# Altium PCB miniGateway（已经打样）.PcbDoc
Units mm, origin at the board's own origin, x right, y up, seen from the top; angles counter-clockwise.
Board outline 152.4 x 101.6 mm, 2 copper layers (Top Layer, Bottom Layer); 16 components, 29 nets, 119 pads, 8 vias.
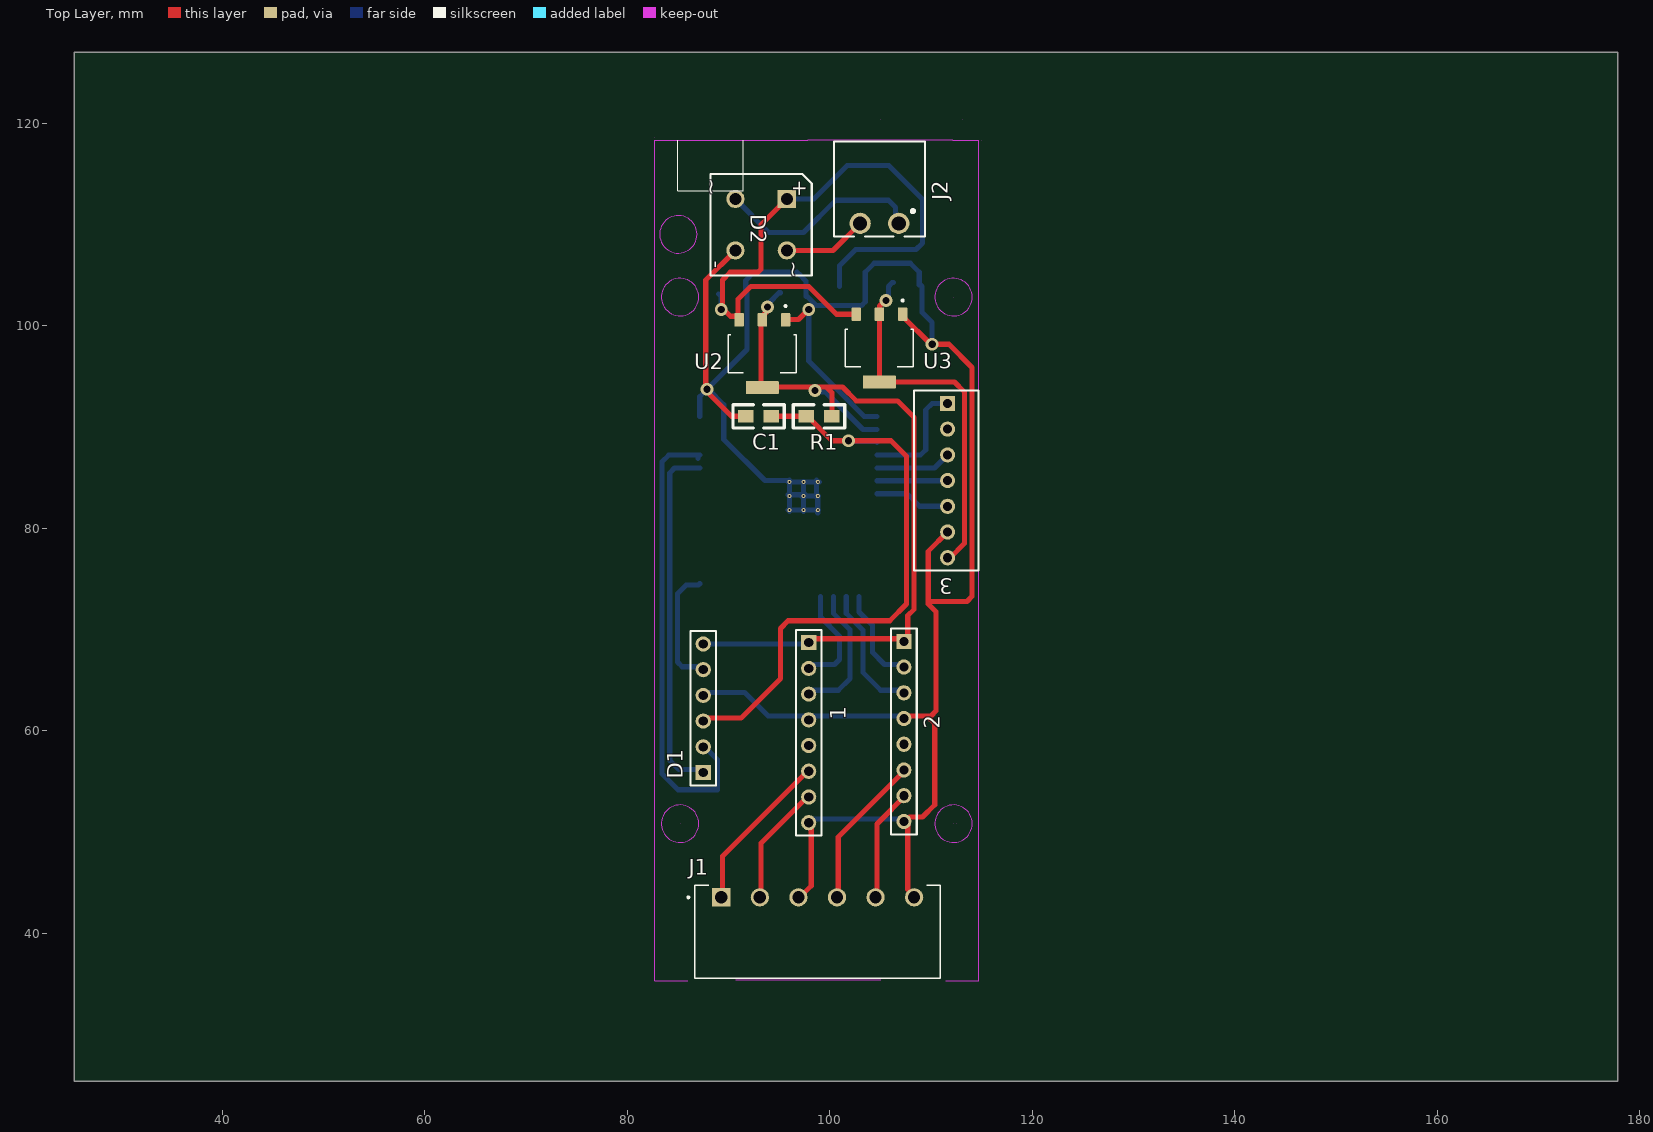
[diagram p0: Top Layer view]
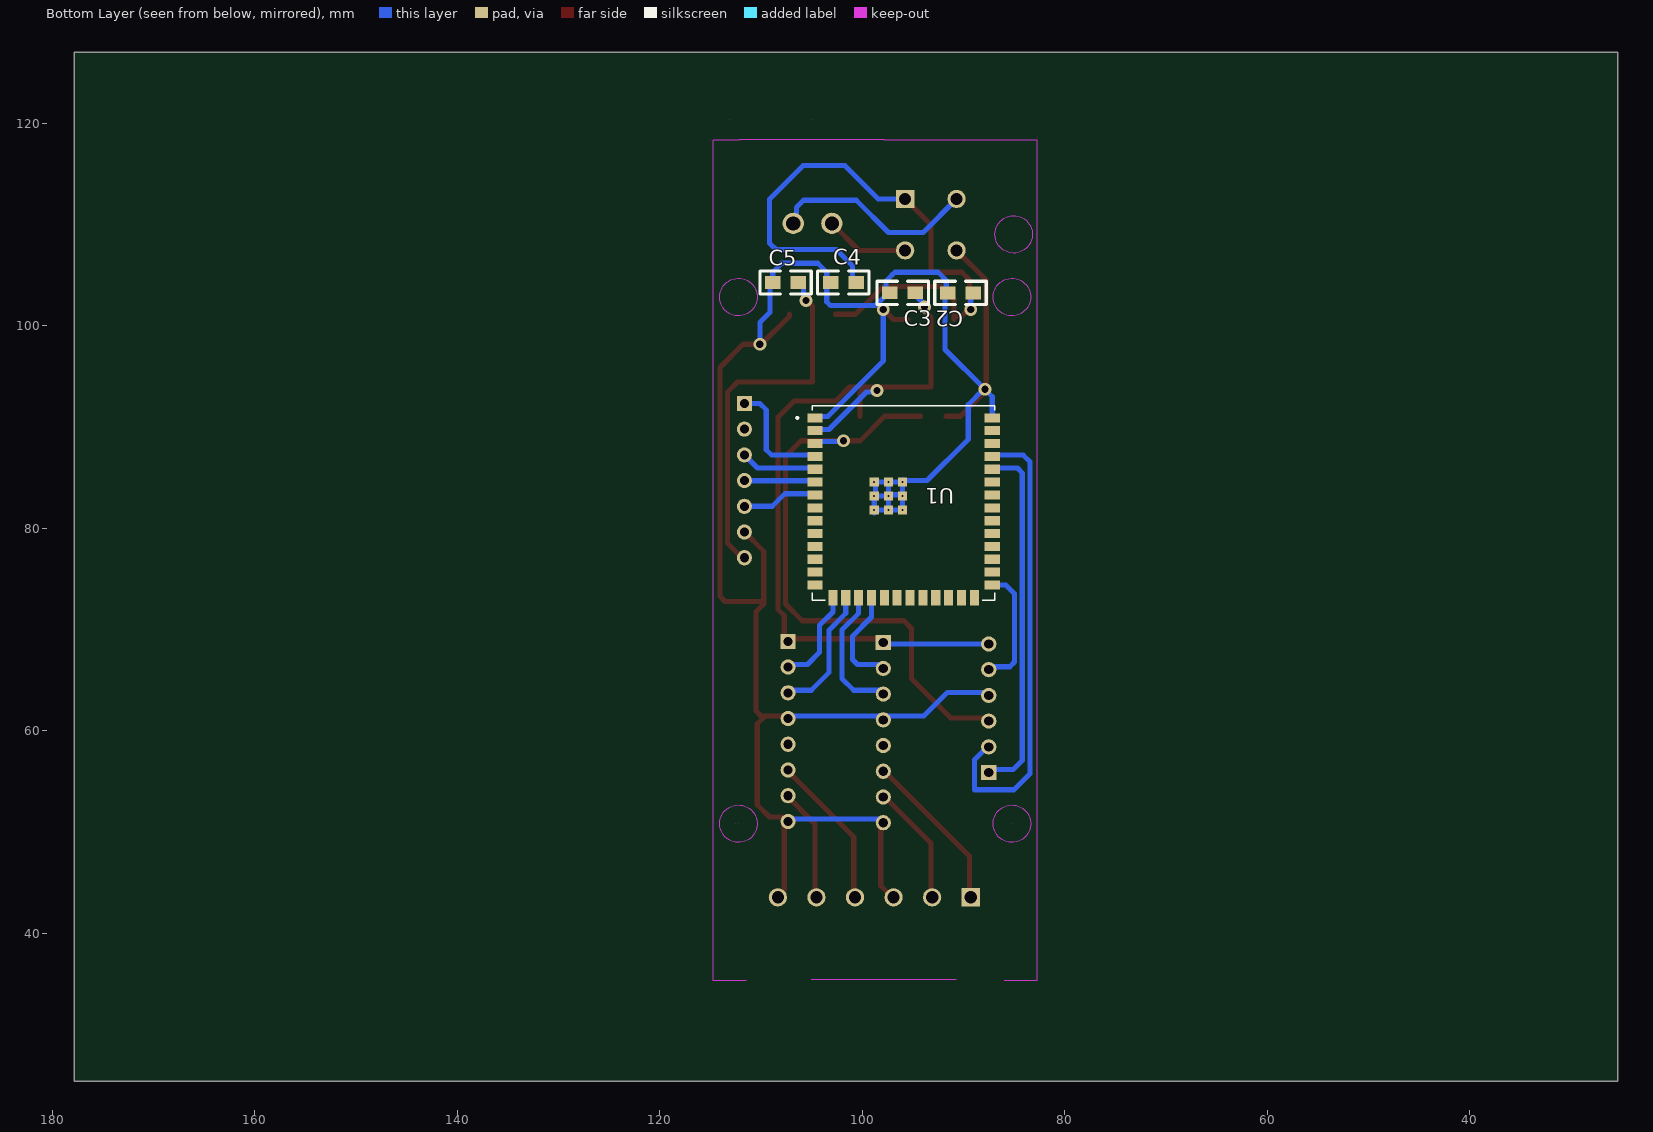
[diagram p1: Bottom Layer view, seen from below]

## Layer stack, top to bottom
Top Solder: solder mask 0.0102, Solder Resist, Dk 3.5
Top Layer: signal copper 0.0356
Dielectric 1: dielectric 0.32, FR-4, Dk 4.8
Bottom Layer: signal copper 0.0356
Bottom Solder: solder mask 0.0102, Solder Resist, Dk 3.5

## Board outline
25.4,25.4 177.8,25.4 177.8,127 25.4,127

## Design rules (kind name [scope] priority, off if disabled: settings)
Clearance [All] p1: gap=0.254 ignorepadtopadclearanceinfootprint=FALSE except(0: Arc-Hole Track-Hole SMDPad-Hole THPad-Hole Via-Hole Fill-Hole Poly-Hole Region-Hole Text-Hole)
PolygonConnect [All] p1: connectstyle=Relief reliefconductorwidth=0.254 reliefentries=4 polygonreliefangle="90 Angle" airgapwidth=0.254
RoutingVias [All] p1: holewidth=0.711 width=1.27 viastyle="Through Hole" minholewidth=0.711 minwidth=1.27 maxholewidth=0.711 maxwidth=1.27
SolderMaskExpansion [All] p1: expansion=0.102 istentingtop=FALSE
Width [All] p1: maxlimit=0.508 minlimit=0.508 preferedwidth=0.508
30 further rules are at their usual default settings.

## Components (designator, comment, footprint, x,y, rotation, side; value= is the part's Value field where it differs from the comment)
1 "Header 8" HDR1X8 97.917,68.707 r270 top
2 "Header 8" HDR1X8 107.315,68.834 r270 top
3 "DS1307模块" DS1307 111.633,92.329 r270 top
C1 "100pf" 0805 91.694,91.059 r180 top value=100pF
C2 "100pf" 0805 91.565,103.249 r0 bottom value=100pF
C3 "100pf" 0805 97.282,103.251 r0 bottom value=100pF
C4 "100pf" 0805 103.124,104.267 r0 bottom value=100pF
C5 "100pf" 0805 108.839,104.267 r0 bottom value=100pF
D1 "2.54DIP6" HDR1X6 87.503,55.88 r90 top
D2 "整流全桥-插" D-38 93.218,109.982 r270 top
J1 "1803316" 6PIN3.81mm 98.298,42.164 r0 top
J2 "691322310002" 691322310002 104.902,110.109 r180 top
R1 "10K" 0805 100.203,91.059 r0 top
U1 "ESP32-S3-WROOM-1U" ESP32-S3-WROOM 97.436,83.133 r180 bottom
U2 "AMS1117-3.3" SOT229P700X180-4N 93.341,97.239 r270 top
U3 "AMS1117-5" SOT229P700X180-4N 104.902,97.79 r270 top

## Footprints (in the part's own frame and the unit in brackets; to place one, negate y for a bottom-side part, rotate by r counter-clockwise, add the part's x,y. Pads: shape width x height; smd on the part's side, far side on the other; paste and mask are expansions set on the pad)
6PIN3.81mm [mm]
  rect 1.8x1.8 hole 1.2: 1(-9.017,1.397)
  round 1.8 hole 1.2: 2(-5.207,1.397) 3(-1.397,1.397) 4(2.413,1.397) 5(6.223,1.397) 6(10.033,1.397)
  silkscreen extent -12.37,-6.6 12.63,2.6
0805 [mil]
  rect 60x50 smd: 1(0,0) 2(-100,0)
  silkscreen extent -150,-45 50,45
691322310002 [mm]
  round 2.1 hole 1.4: 1(-1.905,0) 2(1.905,0)
  silkscreen extent -4.5,-8.1 4.5,1.3
D-38 [mm] "Bridge Rectifier; 4 Terminals; Body 9.4 x 9.4 mm (typ); Pitch 5.08 mm"
  rect 1.8x1.8 hole 1.2: 1(-2.54,2.54)
  round 1.8 hole 1.2: 2(-2.54,-2.54) 3(2.54,-2.54) 4(2.54,2.54)
  silkscreen extent -5,-5 5,5, body extent -5,-5 5,5, height 9.91
DS1307 [mm] "Connector; Header; 7 Position"
  rect 1.5x1.5 hole 0.9: 1(0,0)
  round 1.5 hole 0.9: 2(2.54,0) 3(5.08,0) 4(7.62,0) 5(10.16,0) 6(12.7,0) 7(15.24,0)
  silkscreen extent -1.27,-3.3 16.51,3.05
ESP32-S3-WROOM [mm]
  rect 1.5x0.9 smd: 1(-7.226,7.775) 2(-7.226,6.505) 3(-7.226,5.235) 4(-7.226,3.965) 5(-7.226,2.695) 6(-7.226,1.425) 7(-7.226,0.155) 8(-7.226,-1.115) 9(-7.226,-2.385) 10(-7.226,-3.655) 11(-7.226,-4.925) 12(-7.226,-6.195) 13(-7.226,-7.465) 14(-7.226,-8.735) 27(10.274,-8.735) 28(10.274,-7.465) 29(10.274,-6.195) 30(10.274,-4.925) 31(10.274,-3.655) 32(10.274,-2.385) 33(10.274,-1.115) 34(10.274,0.155) 35(10.274,1.425) 36(10.274,2.695) 37(10.274,3.965) 38(10.274,5.235) 39(10.274,6.505) 40(10.274,7.775)
  rect 0.9x1.5 smd: 15(-5.461,-9.985) 16(-4.191,-9.985) 17(-2.921,-9.985) 18(-1.651,-9.985) 19(-0.381,-9.985) 20(0.889,-9.985) 21(2.159,-9.985) 22(3.429,-9.985) 23(4.699,-9.985) 24(5.969,-9.985) 25(7.239,-9.985) 26(8.509,-9.985)
  rect 0.9x0.9 smd: 41_1(-1.376,1.455) 41_2(0.024,1.455) 41_3(1.424,1.455) 41_4(-1.376,0.055) 41_5(0.024,0.055) 41_6(1.424,0.055) 41_7(-1.376,-1.345) 41_8(0.024,-1.345) 41_9(1.424,-1.345)
  round 0.4 hole 0.2 mask+0: 41_10(-1.376,1.455) 41_11(0.024,1.455) 41_12(-1.376,0.055) 41_13(0.024,0.055) 41_14(1.424,1.455) 41_16(1.424,0.055) 41_17(-1.376,-1.345) 41_18(0.024,-1.345) 41_19(1.424,-1.345)
  silkscreen extent -9.08,-10.24 10.52,8.96
HDR1X6 [mm] "Connector; Header; 6 Position"
  rect 1.5x1.5 hole 0.9: 1(0,0)
  round 1.5 hole 0.9: 2(2.54,0) 3(5.08,0) 4(7.62,0) 5(10.16,0) 6(12.7,0)
  silkscreen extent -1.27,-1.27 13.97,1.27
HDR1X8 [mm] "Connector; Header; 8 Position"
  rect 1.5x1.5 hole 0.9: 1(0,0)
  round 1.5 hole 0.9: 2(2.54,0) 3(5.08,0) 4(7.62,0) 5(10.16,0) 6(12.7,0) 7(15.24,0) 8(17.78,0)
  silkscreen extent -1.27,-1.27 19.05,1.27
SOT229P700X180-4N [mm]
  rrect15% 1.31x0.93 smd: 1(-3.345,2.29) 2(-3.345,0) 3(-3.345,-2.29)
  rrect15% 1.31x3.24 smd: 4(3.345,0)
  silkscreen extent -4.8,-3.36 1.86,3.36, body extent -3.5,-3.25 3.5,3.25, height 1.8

## Part data
1 2: "Header, 8-Pin", LatestRevisionDate=17-Jul-2002, LatestRevisionNote="Re-released for DXP Platform.", Publisher="Altium Limited"
3: library part "Header 7", "Header, 7-Pin", LatestRevisionDate=17-Jul-2002, LatestRevisionNote="Re-released for DXP Platform.", Publisher="Altium Limited"
C1 C2 C3 C4 C5: library part "Cap Semi", "Capacitor (Semiconductor SIM Model)", LatestRevisionDate=29-May-2009, LatestRevisionNote="IPC-7351 Footprint Added.", PackageDescription="Chip Capacitor", PackageReference=C1206, Published=8-Jun-2000, Publisher="Altium Limited"
D1: library part "Header 6", "Header, 6-Pin", LatestRevisionDate=17-Jul-2002, LatestRevisionNote="Re-released for DXP Platform.", Publisher="Altium Limited"
D2: library part Bridge1, "Full Wave Diode Bridge", DatasheetVersion=E2732B, LatestRevisionDate=29-May-2009, LatestRevisionNote="Sch pins A & K swapped.", PackageDescription="Bridge Rectifier; 4 Terminals; Body 9.4 x 9.4 mm (typ); Pitch 5.08 mm", PackageReference=D-38, Published=8-Jun-2000, Publisher="Altium Limited"
J1: "6 Position Terminal Block Header, Male Pins, Shrouded _4 Side_ 0.150 _3.81mm_ 90Â°, Right Angle Through Hole", Package=None, Availability=Unavailable, MF="Phoenix Contact", MP=1803316, Price=None, SnapEDA_Link=https://www.snapeda.com/parts/1803316/Phoenix%20Contact/view-part/681506/?ref=snap
J2: "2 Position Terminal Block Header, Male Pins, Shrouded (4 Side) 0.150 (3.81mm) 90Â°, Right Angle - Through Hole", Package=None, Check_prices=https://www.snapeda.com/parts/691322310002/Wurth+Electronics+Inc./view-part/?ref=eda, MF="Wurth Electronics", MP=691322310002, SnapEDA_Link=https://www.snapeda.com/parts/691322310002/Wurth+Electronics+Inc./view-part/?ref=snap
R1: library part Res3, "Resistor", LatestRevisionDate=29-May-2009, LatestRevisionNote="IPC-7351 Footprint Added.", PackageDescription="Chip Resistor", PackageReference=J1-0603, Published=8-Jun-2000, Publisher="Altium Limited"
U1: "2.4 GHz Wi-Fi (802.11 b/g/n) and Bluetooth 5 (LE) module", Package=Package, Availability="Not in stock", Check_prices=https://www.snapeda.com/parts/ESP32-S3-WROOM-1U/Espressif+Systems/view-part/?ref=eda, MF="Espressif Systems", MP=ESP32-S3-WROOM-1U, Price=None, SnapEDA_Link=https://www.snapeda.com/parts/ESP32-S3-WROOM-1U/Espressif+Systems/view-part/?ref=snap
U2 U3: library part AMS1117, "1A LOW DROPOUT VOLTAGE REGULATOR SOT-223", Package="SOT-223 Seeed Technology", Availability="Not in stock", Check_prices=https://www.snapeda.com/parts/AMS1117/Advanced+Monolithic+Systems/view-part/?ref=eda, MF="Advanced Monolithic Systems", MP=AMS1117, Price=None, SnapEDA_Link=https://www.snapeda.com/parts/AMS1117/Advanced+Monolithic+Systems/view-part/?ref=snap

## Via types
v1: diameter 1.27, hole 0.711, Top Layer to Bottom Layer, 8 vias

## Nets (pads, with @x,y where several pads share a name; then routed paths per layer and width w, separated by ;. In a path a pad name is that pad's centre, name@x,y a point inside that pad or via, vN(x,y) a via of type N, cw(c..) or ccw(c..) an arc to the next point about the centre after c; other vN are vias at no path point)
4GRST: 3.3 U1.5 | length 7.5
  Bottom Layer w0.508: U1.5@104.656,85.949 110.333,85.949 3.3
4GRXD: 3.4 U1.6 | length 7
  Bottom Layer w0.508: U1.6@104.656,84.679 104.671,84.694 111.618,84.694 3.4
4GTXD: 3.5 U1.7 | length 7.5
  Bottom Layer w0.508: U1.7@104.656,83.409 107.638,83.409 108.878,82.169 3.5
12V+: D2.4 J2.2 | length 8.3
  Top Layer w0.508: D2.4 100.33,107.442 J2.2
12V-: D2.2 J2.1 | length 20.5
  Bottom Layer w0.508: D2.2 93.98,109.22 97.409,109.22 100.584,112.395 105.791,112.395 106.502,111.684 106.502,110.414 J2.1
DTR: 3.1 U1.4 | length 11.4
  Bottom Layer w0.508: U1.4@104.656,87.219 108.936,87.219 109.474,87.757 109.474,91.694 110.109,92.329 3.1
EN: C1.2 D1.3 R1.2 U1.3 | length 59.9
  Top Layer w0.508: D1.3@87.63,61.252 91.224,61.252 95.123,65.151 95.123,70.104 95.885,70.866 105.918,70.866 107.569,72.517 107.569,87.122 106.045,88.646 v1(101.854,88.646) 100.203,88.646 97.79,91.059 C1.2
  Bottom Layer w0.508: v1(101.854,88.646) 101.933,88.567 104.577,88.567 U1.3@104.656,88.489
GND: 1.4 1.8 2.4 2.8 3.6 C1.1 C2.1 C3.1 C4.1 C5.1 D1.4 D2.3 J1.3 J1.6 U1.1 U1.40 U1.41_1 U1.41_2 U1.41_3 U1.41_4 U1.41_5 U1.41_6 U1.41_7 U1.41_8 U1.41_9 U2.1 U3.1 | length 236.1
  Top Layer w0.508: D2.3 87.757,104.521 87.757,93.599 90.297,91.059 C1.1 ; U2.1@95.508,100.627 96.914,100.627 97.887,101.6 v1(97.917,101.6) ; J1.3@97.028,43.561 98.171,44.704 1.8@98.171,51.308 ; U3.1 107.192,100.945 v1@110.037,98.099 ; 2.4@107.696,61.468 109.601,61.468 ; J1.6@108.458,43.561 107.696,44.323 107.696,51.308 107.886,51.498 109.156,51.498 110.363,52.705 110.363,60.706 109.601,61.468 ; v1(110.109,98.171) 111.76,98.171 114.046,95.885 114.046,73.279 113.538,72.771 109.728,72.771 ; 3.6 109.728,77.724 109.728,72.771 ; 109.601,61.468 109.982,61.468 110.49,61.976 110.49,71.751 109.728,72.513 109.728,72.771
  Bottom Layer w0.508: U1.40@87.156,91.029 87.156,92.998 v1(87.884,93.726) ; D1.4@87.63,63.792 91.592,63.792 93.916,61.468 2.4@107.696,61.468 ; C2.1@91.694,103.251 91.694,104.477 92.5,105.283 96.774,105.283 97.027,105.03 97.663,104.394 97.663,102.87 97.79,102.87 98.679,101.981 103.124,101.981 103.505,102.362 103.505,105.283 104.394,106.172 107.95,106.172 108.839,105.283 C5.1 108.839,104.013 108.966,104.013 109.093,103.886 109.093,101.322 110.109,100.306 v1(110.109,98.171) ; C2.1@91.821,103.251 91.821,97.663 v1(87.884,93.726) ; 94.307,84.709 U1.41_3@96.012,84.709 ; 95.304,84.709 93.599,84.709 89.535,88.773 89.535,92.202 88.011,93.726 v1(87.884,93.726) ; U1.41_9@95.885,81.788 U1.41_8@97.59,81.788 ; U1.41_6@95.885,83.312 U1.41_5@97.59,83.312 ; U1.41_3@95.885,84.582 U1.41_2@97.59,84.582 ; U1.41_9@96.012,81.661 U1.41_6@96.012,83.366 ; U1.41_6@96.012,83.058 U1.41_3@96.012,84.763 ; U1.41_8@97.155,81.788 U1.41_7@98.86,81.788 ; U1.41_5@97.155,83.185 U1.41_4@98.86,83.185 ; U1.41_2@97.282,84.582 U1.41_1@98.987,84.582 ; U1.41_8@97.409,81.661 U1.41_5@97.409,83.366 ; U1.41_5@97.409,82.931 U1.41_2@97.409,84.636 ; v1(97.917,101.6) 97.917,96.52 103.408,91.029 U1.1@104.656,91.029 ; 1.8@98.171,51.308 2.8@107.696,51.308 ; U1.41_4@98.679,83.058 U1.41_1@98.679,84.763 ; U1.41_7@98.806,81.534 U1.41_4@98.806,83.239
IO0: D1.5 U1.27 | length 12.5
  Bottom Layer w0.508: U1.27@87.156,74.519 87.02,74.383 85.813,74.383 84.963,73.533 84.963,66.802 85.433,66.332 87.63,66.332 D1.5@87.63,66.04
NET: 3.2
RS485A1: 1.6 J1.1 | length 16.5
  Top Layer w0.508: J1.1@89.408,43.561 89.408,47.625 1.6@98.171,56.388
RS485A2: 2.6 J1.4 | length 15.7
  Top Layer w0.508: J1.4@100.838,43.561 100.838,49.53 2.6@107.696,56.388
RS485B1: 1.7 J1.2 | length 12.3
  Top Layer w0.508: J1.2@93.218,43.561 93.218,48.895 1.7@98.171,53.848
RS485B2: 2.7 J1.5 | length 11.5
  Top Layer w0.508: J1.5@104.648,43.561 104.648,50.8 2.7@107.696,53.848
RX1: 1.3 U1.17 | length 13.1
  Bottom Layer w0.508: 1.3@98.171,64.008 100.838,64.008 101.981,65.151 101.981,69.977 100.351,71.607 U1.17@100.351,73.269
RX2: 2.3 U1.16 | length 13.3
  Bottom Layer w0.508: U1.16@101.621,73.269 101.621,71.607 103.261,69.967 103.261,65.776 105.029,64.008 107.315,64.008 2.3@107.696,64.008
RXD0: D1.1 U1.36 | length 35.6
  Bottom Layer w0.508: U1.36@87.156,85.949 84.679,85.949 84.201,85.471 84.201,57.067 85.095,56.172 D1.1@87.63,56.172 ; D1.1@87.484,56.026 D1.1@87.63,55.88
TX1: 1.2 U1.18 | length 10
  Bottom Layer w0.508: 1.2@98.171,66.548 100.457,66.548 100.965,67.056 100.965,69.342 99.081,71.226 U1.18@99.081,73.269
TX2: 2.2 U1.15 | length 10.1
  Bottom Layer w0.508: U1.15@102.891,73.269 102.891,71.734 104.203,70.422 104.203,67.755 105.41,66.548 107.315,66.548 2.2@107.696,66.548
TXD0: D1.2 U1.37 | length 45.9
  Bottom Layer w0.508: U1.37@86.995,86.907 86.995,87.058 U1.37@87.156,87.219 ; U1.37@86.995,87.219 84.088,87.219 83.439,86.57 83.439,55.753 85.014,54.178 88.9,54.178 88.9,57.15 D1.2@87.63,58.42
USB_D+: U1.13
USB_D-: U1.14
VCC: C2.2 C4.2 D2.1 U2.3 U3.3 | length 65.3
  Top Layer w0.508: U2.3@90.717,100.933 90.202,100.933 89.408,101.727 89.408,104.521 90.17,105.283 92.92,105.283 93.218,105.581 93.218,109.982 D2.1 ; U2.3@90.928,100.627 90.928,102.612 92.202,103.886 97.917,103.886 100.668,101.135 U3.3
  Bottom Layer w0.508: C2.2@89.027,103.124 89.281,102.87 v1(89.281,101.6) ; D2.1 98.425,112.522 101.727,115.824 105.816,115.824 109.144,112.497 109.144,108.153 108.509,107.518 102.565,107.518 100.965,105.918 C4.2@100.965,103.886
VCC50: 3.7 C5.2 U3.2 U3.4 | length 36.5
  Top Layer w0.508: v1(105.537,102.489) 105.452,102.489 104.902,101.939 U3.2 U3.4 112.311,94.445 113.284,93.472 113.284,78.486 111.887,77.089 3.7
  Bottom Layer w0.508: v1(105.537,102.489) 105.537,102.695 105.791,102.949 105.791,103.886 106.172,104.267 C5.2
VDD33: 1.1 2.1 C3.2 D1.6 R1.1 U1.2 U2.2 U2.4 | length 79.1
  Top Layer w0.508: v1@93.707,101.306 93.218,100.817 93.218,100.627 93.218,93.937 99.687,93.937 ; 1.1@98.171,69.088 107.696,69.088 107.696,71.374 108.331,72.009 108.331,90.932 106.68,92.583 102.616,92.583 101.262,93.937 99.687,93.937 ; R1.1 100.203,93.421 99.687,93.937
  Bottom Layer w0.508: D1.6@87.63,68.58 97.663,68.58 1.1@98.171,69.088 ; v1(93.853,101.854) 93.999,102 93.999,102.254 94.996,103.251 C3.2@95.123,103.251 ; v1(98.552,93.599) 98.698,93.453 99.587,93.453 103.281,89.759 U1.2@104.656,89.759
W_CLK: U1.20
W_CS: U1.22
W_MISO: U1.21
W_MOSI: U1.19
pads on no net: 1.5 2.5 U1.8 U1.9 U1.10 U1.11 U1.12 U1.23 U1.24 U1.25 U1.26 U1.28 U1.29 U1.30 U1.31 U1.32 U1.33 U1.34 U1.35 U1.38 U1.39 U1.41_10 U1.41_11 U1.41_12 U1.41_13 U1.41_14 U1.41_16 U1.41_17 U1.41_18 U1.41_19

## Keep-outs
Keep-Out Layer:
  circle w0.013: c85.04,109.022 r1.85
  circle w0.006: c86.599,108.027 r0.003
  circle w0.006: c84.348,49.201 r0.003
  circle w0.006: c114.006,103.322 r0.003
  circle w0.006: c86.781,101.836 r0.003
  circle w0.006: c113.122,120.331 r0.003
  circle w0.006: c115.022,118.331 r0.003
  circle w0.006: c82.722,118.631 r0.003
  circle w0.006: c104.972,120.331 r0.003
  circle w0.006: c82.722,118.331 r0.003
  circle w0.006: c112.222,50.831 r0.003
  circle w0.006: c85.222,50.831 r0.003
  circle w0.006: c114.722,118.331 r0.003
  circle w0.006: c112.222,102.831 r0.003
  circle w0.006: c114.722,35.331 r0.003
  circle w0.006: c112.522,50.831 r0.003
  circle w0.006: c112.222,102.831 r0.003
  circle w0.006: c112.222,50.831 r0.003
  circle w0.006: c114.722,118.331 r0.003
  circle w0.006: c82.722,118.331 r0.003
  circle w0.013: c112.222,102.831 r1.85
  circle w0.013: c85.222,102.831 r1.85
  circle w0.013: c85.222,50.831 r1.85
  circle w0.013: c112.222,50.831 r1.85
  lines w0.013: 84.472,118.331 82.722,118.331 ; 85.972,35.331 82.722,35.331 82.722,118.331 ; 90.729,35.433 105.029,35.433 ; 97.822,118.331 91.472,118.331 84.972,118.331 82.722,118.331 ; 97.841,118.364 112.141,118.364 ; 111.472,35.331 114.722,35.331 114.722,118.331 ; 112.122,118.331 114.722,118.331 ; 113.122,118.331 114.722,118.331

## Silkscreen, mask and mechanical layers (free items; w line width, h text height)
Top Overlay:
  lines w0.013: 84.972,118.331 84.972,113.331 91.472,113.331 91.472,118.331

## Text inside footprints (layer, text, board x,y; h text height)
D2: Top Overlay "+" at 96.382,114.392 h1.5 r270; Top Overlay "-" at 88.138,106.426 h1.5 r270; Top Overlay "~" at 87.63,114.554 h1.5 r270; Top Overlay "~" at 95.758,106.426 h1.5 r270